# EAGLE board trackoon solar (EAGLE 7.2.0)
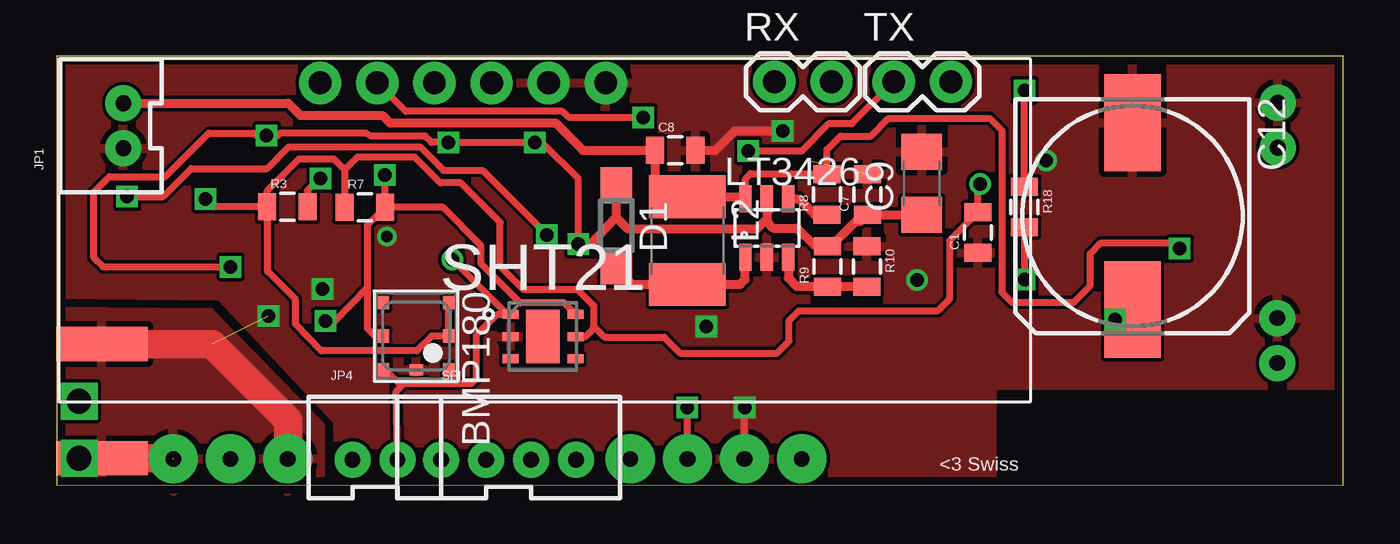
[diagram p0: board, top side]
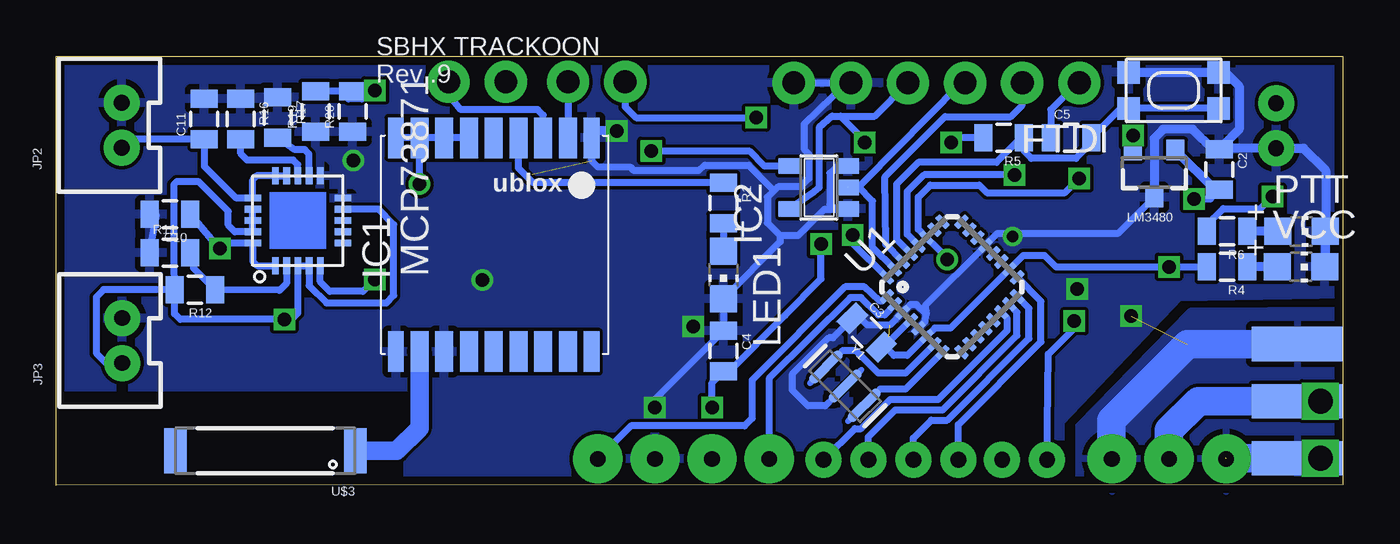
[diagram p1: board, bottom side, seen from below]

Size 57.2 x 19.07 mm. Coordinates in mm from the lower left corner, seen from the top.
Outline: 0,0.03 57.2,0 57.2,19.07 0,19.07 0,0.03
Copper layers (1*16): Top 0.0356mm / dielectric 1.5011mm / Bottom 0.0356mm
Design rules "oshpark-2layer": minimum track width 6mil, minimum drill 13mil, track to track 6mil, track to pad 6mil, pad to pad 6mil, via to via 6mil, smd to smd 6mil, copper to edge 15mil, drill to drill 6mil, minimum pad ring 7mil, minimum via ring 7mil, stop-mask expansion 4mil, vias tented up to drill 0mil, thermal gap 10mil

## Footprints (pad centres in the part's own frame; a part is rotated, then mirrored left to right if it is on the bottom)
BMP180 = smd 0.6 x 0.5: 1 1.5,1.45; 2 0,1.45; 3 -1.5,1.45; 4 -1.5,-1.45; 5 0,-1.45; 6 1.5,-1.45 | smd 0.5 x 0.6: 7 1.5,0
0805 = smd 0.8 x 1.2: 1 -0.9,0; 2 0.9,0
C1206 = smd 1.6 x 1.8: 1 -1.4,0; 2 1.4,0
153CLV-1012 = smd 4.3 x 2.5: + 4.15,0; - -4.15,0
SOD123 = smd 1.4 x 1.4: A 1.9,0; C -1.9,0
1X06_NO_SILK = drill 1.016 pad 1.88: 1 0,0; 2 2.54,0; 3 5.08,0; 4 7.62,0; 5 10.16,0; 6 12.7,0
QFN20 = smd 0.75 x 0.3: 1 -2,1; 2 -2,0.5; 3 -2,0; 4 -2,-0.5; 5 -2,-1; 11 2,-1; 12 2,-0.5; 13 2,0; 14 2,0.5; 15 2,1 | smd 0.3 x 0.75: 6 -1,-2; 7 -0.5,-2; 8 0,-2; 9 0.5,-2; 10 1,-2; 16 1,2; 17 0.5,2; 18 0,2; 19 -0.5,2; 20 -1,2
SOT23-5 = smd 0.69 x 0.99: 1 -0.95,-1.29; 2 0,-1.29; 3 0.95,-1.29; 4 0.95,1.3; 5 -0.95,1.3
SMA-EDGE = smd 1.524 x 4.064: GND@0 0,0; GND@1 5.08,0; SIG 2.54,0 | smd 1.524 x 4.064 bottom: GND@2 0,0; GND@3 5.08,0
JST-2-PTH-VERT = drill 0.7 pad 1.6: 1 -1,-0.55; 2 1,-0.55
L1812 = smd 1.9 x 3.4: 1 -1.95,0; 2 1.95,0
CHIP-LED0805 = smd 1.2 x 1.2: A 0,-1.05; C 0,1.05
SOT23-3 = smd 0.8 x 0.9: 1 -0.95,-1; 2 0.95,-1; 3 0,1.1
SOT23-6 = smd 0.55 x 1.2: 1 -0.95,-1.3; 2 0,-1.3; 3 0.95,-1.3; 4 0.95,1.3; 5 0,1.3; 6 -0.95,1.3
1X02 = drill 1.016 pad 1.88: 1 0,0; 2 2.54,0
DFN300X300X110-7N = smd 0.711 x 0.406: 1 -1.448,0.991; 2 -1.448,0; 3 -1.448,-0.991; 4 1.448,-0.991; 5 1.448,0; 6 1.448,0.991 | smd 1.499 x 2.388: 7 0,0
JST-4-PTH-VERT = drill 0.7 pad 1.6: 1 -3,-0.55; 2 -1,-0.55; 3 1,-0.55; 4 3,-0.55
KMR2 = smd 1 x 1: 1 2,0.8; 2 2,-0.8; 3 -2,0.8; 4 -2,-0.8
MLF32 = smd 0.7 x 0.3: 1 -2.35,1.75; 2 -2.35,1.25; 3 -2.35,0.75; 4 -2.35,0.25; 5 -2.35,-0.25; 6 -2.35,-0.75; 7 -2.35,-1.25; 8 -2.35,-1.75; 17 2.35,-1.75; 18 2.35,-1.25; 19 2.35,-0.75; 20 2.35,-0.25; 21 2.35,0.25; 22 2.35,0.75; 23 2.35,1.25; 24 2.35,1.75 | smd 0.3 x 0.7: 9 -1.75,-2.35; 10 -1.25,-2.35; 11 -0.75,-2.35; 12 -0.25,-2.35; 13 0.25,-2.35; 14 0.75,-2.35; 15 1.25,-2.35; 16 1.75,-2.35; 25 1.75,2.35; 26 1.25,2.35; 27 0.75,2.35; 28 0.25,2.35; 29 -0.25,2.35; 30 -0.75,2.35; 31 -1.25,2.35; 32 -1.75,2.35
UBLOX_MAX = smd 1.8 x 0.7: 1_GND 4.95,-4.4; 9_V_RESET 4.95,4.3; 10_GND -4.55,4.3; 18_RESERVED -4.55,-4.4 | smd 1.8 x 0.8: 2_TXD1 4.95,-3.35; 3_RXD1 4.95,-2.25; 4_TIMEPULSE 4.95,-1.15; 5_EXTINT0 4.95,-0.05; 6_V_BCKP 4.95,1.05; 7_VCC_IO 4.95,2.15; 8_VCC 4.95,3.25; 11_RF_IN -4.55,3.25; 12_GND -4.55,2.15; 13_ANTON -4.55,1.05; 14_VCC_RF -4.55,-0.05; 15_RESERVED -4.55,-1.15; 16_SDA2 -4.55,-2.25; 17_SCL2 -4.55,-3.35
RADIOMETRIX-HX1 = drill 0.7 pad 2.184: 0V 8.89,-10.16; EN 3.81,-10.16; RFGND -11.43,-10.16; RFGND2 -16.51,-10.16; RFOUT -13.97,-10.16; TXD 11.43,-10.16; VCC 6.35,-10.16
ANTENNA-CHIP4 = smd 1 x 2: NC 4,0; SIG -4,0
RESONATOR-SMD = smd 0.45 x 1.905: 1 -1.2,0; 2 0,0; 3 1.2,0

## Placement (x,y rotation side)
BMP180  BMP180  [BMP180]  15.98,6.63 270 top
C1  .1uf  [0805]  40.94,11.23 90 top
C2  .1uf  [0805]  5.49,14.02 270 bottom
C3  .1uf  [0805]  21.16,6.78 315 bottom
C4  .1uf  [0805]  27.53,5.97 270 bottom
C5  .1uf  [0805]  12.07,15.45 0 bottom
C7  22uf  [0805]  36.04,12.93 90 top
C8  10uf  [0805]  27.51,14.88 0 top
C9  100uf  [C1206]  38.46,13.41 90 top
C10  10uf  [0805]  52.15,12.04 180 bottom
C11  10uf  [0805]  50.62,16.28 90 bottom
C12  [153CLV-1012]  47.83,11.96 270 top
D1  MBR120VLSFT1  [SOD123]  24.87,11.53 270 top
FRAME1  FRAME-LETTER  [CREATIVE_COMMONS]  14.38,-8.13 0 top  (outside the outline)
FTDI  [1X06_NO_SILK]  11.71,17.88 180 bottom
IC1  MCP73871  [QFN20]  46.46,11.76 90 bottom
IC2  74AHC1G125DBV  [SOT23-5]  23.29,13.23 90 bottom
J$1  SMA_EDGE  [SMA-EDGE]  2.01,1.19 90 bottom
JP1  M02JST-PTH-VERT  [JST-2-PTH-VERT]  2.41,15.98 90 top
JP2  M02JST-PTH-VERT  [JST-2-PTH-VERT]  54.84,16 90 bottom
JP3  M02JST-PTH-VERT  [JST-2-PTH-VERT]  54.81,6.43 90 bottom
JP4  M02JST-PTH-VERT  [JST-2-PTH-VERT]  14.15,1.68 0 top
L2  2.2uh  [L1812]  28.04,10.87 270 top
LED1  [CHIP-LED0805]  27.53,9.35 180 bottom
LM3480  LM3480IM4  [SOT23-3]  8.38,13.89 180 bottom
LT3426  LT3426  [SOT23-6]  31.57,11.43 0 top
PTT  [CHIP-LED0805]  1.83,11.28 270 bottom
R1  100ohm  [0805]  27.53,12.55 270 bottom
R3  4.7k  [0805]  10.26,12.37 0 top
R4  330ohm  [0805]  5.13,9.7 180 bottom
R5  10k  [0805]  15.08,15.43 180 bottom
R6  330ohm  [0805]  5.13,11.28 180 bottom
R7  4.7k  [0805]  13.69,12.34 0 top
R8  1m  [0805]  34.24,12.93 90 top
R9  95.3k  [0805]  34.26,9.73 90 top
R10  30.9k  [0805]  36.02,9.73 270 top
R11  100k  [0805]  52.15,10.34 0 bottom
R12  270k  [0805]  51.03,8.69 180 bottom
R16  2k  [0805]  49,16.28 270 bottom
R17  100k  [0805]  47.35,16.33 270 bottom
R18  1k  [0805]  43.03,12.37 270 top
R19  10k  [0805]  45.67,16.61 90 bottom
R20  150k  [0805]  44.02,16.61 90 bottom
RX  RX  [1X02]  31.9,17.93 0 top
SHT21  SHT21  [DFN300X300X110-7N]  21.62,6.6 0 top
SPI  [JST-4-PTH-VERT]  20.09,1.68 0 top
SW1  SPST_TACT-KMR2  [KMR2]  7.52,17.55 180 bottom
TX  TX  [1X02]  37.21,17.93 0 top
U1  ATMEGA168MLF  [MLF32]  17.37,8.81 45 bottom
U$1  UBLOX_MAX  [UBLOX_MAX]  37.8,10.49 90 bottom
U$2  RADIOMETRIX-HX1  [RADIOMETRIX-HX1]  21.69,11.33 0 top
U$3  ANTENNA2SMD3  [ANTENNA-CHIP4]  47.9,1.52 180 bottom
VCC  [CHIP-LED0805]  1.85,9.7 270 bottom
Y1  16MHZ  [RESONATOR-SMD]  22.13,4.4 315 bottom

## Library data of the parts
BMP180 = SparkFun-Sensors
C1-C5 C7 C8 C10 C11 = SparkFun-Capacitors
C9 L2 = resistor
C12 IC1 LED1 LT3426 PTT SW1 VCC = adafruit
D1 = diode
FRAME1 = SparkFun-Aesthetics
FTDI = SparkFun-Connectors; PROD_ID: CONN-08437
IC2 = 74xx-little-us
J$1 JP1-JP4 RX SPI TX = SparkFun-Connectors
LM3480 = SparkFun-PowerIC
R1 R3-R12 R16-R20 = SparkFun-Resistors
SHT21 = sht21; MPN: SHT21; OC_FARNELL: 1855468; OC_NEWARK: 20T1172; PACKAGE: DFN-6; SUPPLIER: SENSIRION
U1 = SparkFun-DigitalIC
U$1 U$2 = Ava
U$3 = SparkFun-RF
Y1 = SparkFun-FreqCtrl; PROD_ID: XTAL-08900

## Nets
3V: BMP180.2 BMP180.3 C1.2 C2.2 LM3480.1 R3.1 R7.1 SHT21.5 U$1.6_V_BCKP U$1.7_VCC_IO U$1.8_VCC U$1.9_V_RESET
15V: C8.1 C10.1 IC1.1 IC1.20 JP1.2 L2.1 LT3426.6 R8.2
D3: U1.1 U$2.TXD
D4: U1.2 U$2.EN
DTR: C5.1 FTDI.1
GND: BMP180.7 C1.1 C2.1 C3.1 C4.1 C7.2 C8.2 C9.2 C10.2 C11.2 C12.- FTDI.5 FTDI.6 IC1.10 IC1.11 IC2.1 IC2.3 J$1.GND@0 J$1.GND@1 J$1.GND@2 J$1.GND@3 JP1.1 JP2.2 JP3.2 LED1.C LM3480.3 LT3426.2 PTT.C R10.1 R11.1 R16.1 R17.1 R19.1 R20.1 SHT21.2 SW1.2 SW1.4 U1.3 U1.5 U1.21 U$1.1_GND U$1.10_GND U$1.12_GND U$2.0V U$2.RFGND U$2.RFGND2 VCC.C Y1.2
LED: R6.2 U1.32
MISO: SPI.2 U1.16
MOSI: SPI.3 U1.15
N$1: J$1.SIG U$2.RFOUT
N$2: R1.1 U$1.4_TIMEPULSE
N$3: LED1.A R1.2
N$6: U$1.11_RF_IN U$3.SIG
N$8: R4.1 VCC.A
N$9: D1.A L2.2 LT3426.1
N$12: LT3426.4 R8.1
N$13: LT3426.3 R9.1 R10.2
N$14: U1.8 Y1.3
N$17: IC1.2 R11.2 R12.1
N$19: C5.2 R5.1 SW1.1 SW1.3 U1.29
N$23: IC1.13 R16.2
N$25: IC1.12 R17.2
N$26: U1.7 Y1.1
N$27: PTT.A R6.1
N$29: IC1.5 R18.2
N$30: R18.1 R19.2 R20.2
RX: TX.2 U$1.3_RXD1
RXO: FTDI.2 RX.1 U1.30
SCK: SPI.1 U1.17
SCL: BMP180.5 JP4.1 R7.2 SHT21.6 U1.28
SDA: BMP180.6 JP4.2 R3.2 SHT21.1 U1.27
SS: SPI.4 U1.14
TX: RX.2 U$1.2_TXD1
TX1: IC2.4 TX.1
TXO: FTDI.3 IC2.2 U1.31
VBATT: C11.1 IC1.14 IC1.15 IC1.16 JP2.1
VCC: C3.2 C4.2 C7.1 C9.1 D1.C FTDI.4 IC2.5 LM3480.2 LT3426.5 R4.2 R5.2 R9.2 U1.4 U1.6 U1.18 U$2.VCC
VSOLAR: C12.+ IC1.3 IC1.4 IC1.9 IC1.17 IC1.18 IC1.19 JP3.1 R12.2

## Tracks (layer width: path | path; a pad name or v marks a point on that pad's centre or on a via)
3V  (via drill 0.6)
  Top 0.305: R3.1 6.96,12.37 v6.6,12.73 | R3.1 9.36,13.1 10.77,14.5 12.32,14.5 12.8,14.02 | 12.8,14.02 12.8,12.36 R7.1 12.79,12.23 | 12.8,14.02 13.36,14.58 15.9,14.58 17.04,13.44 17.96,13.44 19.71,11.68 19.71,9.73 20.75,8.69 23.16,8.69 23.88,7.98 23.88,7.06 | R3.1 9.37,12.36 9.37,9.5 10.62,8.26 10.62,7.16 11.76,5.97 16,5.97 16.66,6.63 BMP180.2 BMP180.3 | SHT21.5 23.52,6.6 23.88,6.96 23.88,7.06 | 23.88,7.06 24.36,6.58 27,6.58 27.71,5.87 32.03,5.87 32.56,6.4 32.56,7.32 32.99,7.75 39.17,7.75 39.7,8.28 39.7,10.88 C1.2 40.95,13.23 v41.05,13.39
  Bottom 0.305: U$1.6_V_BCKP U$1.7_VCC_IO U$1.8_VCC | U$1.8_VCC U$1.9_V_RESET | v6.6,12.73 5.88,12.73 C2.2 | v41.05,13.39 U$1.8_VCC
  Bottom 0.406: C2.2 5.66,13.12 LM3480.1
15V  (via drill 0.6)
  Top 0.305: LT3426.6 30.62,13.63 30.84,13.84 34.23,13.84 R8.2 34.24,14.91 34.85,15.52 36.2,15.52 36.98,16.31 41.48,16.31 42.01,15.77 42.01,8.59 42.47,8.13 45.21,8.13 45.95,8.86 45.95,10.29 46.43,10.77 49.82,10.77 v49.93,10.52
  Top 0.406: JP1.2 10.28,16.98 10.82,16.43 14.48,16.43 14.81,16.1 22.17,16.1 23.39,14.88 C8.1 26.61,13.55 27.36,12.8 28.02,12.8 L2.1 30.53,12.82 LT3426.6
  Bottom 0.305: IC1.1 48.26,9.75 48.46,9.95 IC1.20 49.81,10.76 v49.93,10.52 50.19,10.78 C10.1
D3
  Bottom 0.305: U1.1 20.48,8.18 20.57,8.18 21.26,8.81 22.12,8.81 26.26,4.67 26.26,2.97 26.59,2.64 31.65,2.64 U$2.TXD
D4
  Bottom 0.305: U1.2 20.36,7.57 20.65,7.57 21.41,8.33 21.89,8.33 25.5,4.75 U$2.EN
DTR
  Bottom 0.305: FTDI.1 11.79,17.88 12.98,16.69 C5.1
GND  (via drill 0.5, 0.6, 1.1)  (4 unrouted)
  Top 0.305: U$2.0V v30.58,3.45
  Top 0.406: C8.2 29.29,14.88 30.15,15.75 v32.28,15.75
  Top 1.27: J$1.GND@1 6.91,6.27 10.29,2.9 10.29,1.19 U$2.RFGND | 1.91,1.19 5.21,1.19
  Bottom 0.305: U1.5 18.57,7.27 18.52,7.59 | 18.52,7.59 18.95,8.03 19.22,8.03 U1.3 20.14,7.11 21.13,7.11 21.44,7.42 C3.1 22.66,6.55 22.86,6.55 24.49,4.93 24.49,4.24 23.77,3.53 23,3.53 22.84,3.69 | 18.52,7.59 18.57,7.97 U1.21 15.37,11.18 10,11.18 LM3480.3 | FTDI.6 22.05,17.88 | FTDI.5 22.05,17.88 | 22.05,17.88 23.95,16.05 23.95,14.94 23.72,14.71 23.72,13.64 24.11,13.26 25.12,13.26 25.3,13.08 | 25.3,13.08 25.58,12.8 25.58,11.66 25.02,11.1 | 25.02,11.1 24.21,11.1 23.04,12.27 22.55,12.27 | 22.55,12.27 22.02,12.27 IC2.1 | IC2.3 22.44,14.18 22.81,13.87 22.81,12.47 22.55,12.27 | 25.02,11.1 25.02,10.81 LED1.C C4.1 30.58,3.82 v30.58,3.45 | U$1.1_GND 33.4,14.42 33.12,14.15 31.67,14.15 31.52,14 28.63,14 28.37,14.22 26.42,14.22 25.3,13.08 | R11.1 52.74,12.01 C10.2
  Bottom 0.406: SW1.2 SW1.4 5.22,18.35 4.6,17.73 4.6,15.81 C2.1 | VCC.C 0.78,9.73 PTT.C 0.76,11.29 0.76,14 1.74,14.98 JP1.1 5.43,14.98 C2.1 | C2.1 5.78,14.92 6.68,15.82 7.98,15.82 8.38,15.42 LM3480.3 | v32.28,15.75 33.19,15.75 U$1.1_GND
  Bottom 1.27: U$2.RFGND2 5.16,1.19 J$1.GND@2 | J$1.GND@1 6.91,6.27 10.29,2.9 10.29,1.19 U$2.RFGND
  other vias: 28.88,7.06 9.4,7.52 14.68,11.05 11.81,8.71 0.99,1.19 43.99,14.43 38.25,9.12
  pour Top: -0.13,19.08 57.4,19.23 57.43,4.42 41.58,4.42 41.58,-0.3 12.6,-0.46 12.5,2.84 7.29,8.38 -0.1,8.46
  pour Bottom: -0.15,19.08 57.38,19.2 57.43,4.37 41.58,4.37 41.58,-0.33 12.7,-0.46 12.55,-0.3 12.55,2.82 7.29,8.38 -0.2,8.51
  pour Top: -0.1,7.75 6.81,7.7 11.71,2.67 11.71,-0.46 -0.1,-0.33
  pour Bottom: -0.1,7.77 6.78,7.72 11.76,2.62 11.76,-0.43 0,-0.41
LED  (via drill 0.6)
  Top 0.305: v3.12,12.83 4.72,12.83 5.97,14.07 9.35,14.07 10.31,15.04 16.15,15.04 17.2,14 18.92,14 v21.79,11.13
  Bottom 0.305: R6.2 6.03,11.57 5.31,12.29 3.66,12.29 v3.12,12.83 | v21.79,11.13 21.79,10.76 U1.32
MISO
  Bottom 0.305: SPI.2 19.09,2.09 18.29,2.9 17.58,2.9 13.95,6.53 13.95,7.86 U1.16
MOSI
  Bottom 0.305: SPI.3 21.09,2.15 19.89,3.35 17.78,3.35 14.48,6.65 14.48,7.69 U1.15
N$1
  Bottom 1.27: J$1.SIG 6.43,3.73 7.72,2.44 U$2.RFOUT
N$2
  Bottom 0.305: R1.1 36,13.45 36.65,14.1 36.65,15.53 U$1.4_TIMEPULSE
N$3
  Bottom 0.305: R1.2 LED1.A
N$6
  Bottom 0.813: U$1.11_RF_IN 41.05,2.54 42.06,1.52 U$3.SIG
N$8
  Bottom 0.406: VCC.A R4.1
N$9
  Top 0.406: LT3426.1 30.61,10.11 30.61,9.14 30.38,8.92 L2.2 25.58,8.92 D1.A
N$12
  Top 0.406: LT3426.4 32.99,12.73 33.71,12.01 34.23,12.01 R8.1
N$13
  Top 0.406: R10.2 R9.1 34.25,8.84 32.89,8.84 32.52,9.21 LT3426.3
N$14
  Bottom 0.305: U1.8 19.44,4.27 20.56,4.27
N$17
  Bottom 0.305: IC1.2 46.96,8.97 47.27,8.66 R12.1 51.09,9.65 R11.2
N$18  (via drill 1.1)
  other vias: 0.99,3.73
N$19
  Bottom 0.305: SW1.3 SW1.1 9.87,16.75 C5.2 11.17,15.22 11.86,14.53 13.84,14.53 14.17,14.86 R5.1 14.31,15.43 15.39,14.35 18.87,14.35 19.84,13.39 19.84,10.92 U1.29
N$23
  Bottom 0.305: IC1.13 46.46,14.25 46.66,14.45 48.72,14.45 49,14.73 R16.2
N$25
  Bottom 0.305: IC1.12 45.96,14.71 46.15,14.91 46.59,14.91 R17.2
N$26
  Bottom 0.305: U1.7 19.44,4.98 20.65,4.98 21.64,5.97 22.26,5.97
N$27
  Bottom 0.406: PTT.A R6.1
N$29  (via drill 0.6)
  Top 0.305: R18.2 v43.03,9.14
  Bottom 0.305: v43.03,9.14 43.56,8.61 45.03,8.61 45.47,9.04 IC1.5
N$30  (via drill 0.6)
  Top 0.305: R18.1 v43.03,17.55
  Bottom 0.305: v43.03,17.55 43.61,17.17 44.21,17.17 R20.2 R19.2
RX
  Bottom 0.305: U$1.3_RXD1 35.55,16.44 35.79,16.69 39.22,16.69 39.75,17.35 TX.2
RXO  (via drill 0.6)
  Top 0.305: v26.09,16.33 22.78,16.33 22.48,16.61 15.52,16.61 FTDI.2
  Bottom 0.305: U1.30 20.32,10.7 20.34,13.72 17.68,16.38 14.76,16.38 14.25,16.89 FTDI.2 | RX.1 31.9,16.81 31.42,16.33 v26.09,16.33
SCK
  Bottom 0.305: SPI.1 17.09,2.7 13.41,6.38 13.41,8.17 U1.17
SCL  (via drill 0.6)
  Top 0.305: R7.2 14.59,13.3 v14.58,13.79 | BMP180.5 14.17,6.6 13.82,6.96 13.82,8.79 | 13.82,8.79 13.82,11.57 R7.2 | SHT21.6 22.55,8.1 20.6,8.1 18.86,9.84 U1.28 17.17,12.34 R7.2 | v11.94,7.29 12.34,7.29 13.82,8.79
  Bottom 0.305: U1.28 19.36,11.15 19.36,13.06 18.62,13.79 v14.58,13.79 | JP4.1 13.1,5.83 11.94,6.99 v11.94,7.29
SDA  (via drill 0.6)
  Top 0.305: v11.71,13.64 11.68,13.64 11.15,13.11 11.15,12.38 R3.2 | BMP180.6 14.76,4.98 15.21,4.52 15.44,4.52 | 15.44,4.52 18.44,4.52 18.67,4.75 18.67,6.68 19.58,7.59 SHT21.1 20.02,7.59 v17.58,10.03 | JP4.2 15.1,4.18 15.44,4.52
  Bottom 0.305: v11.71,13.64 12.34,13 15.82,13 16.15,13.34 18.34,13.34 18.87,12.8 18.87,11.37 U1.27 17.58,10.1 v17.58,10.03
SS
  Bottom 0.305: SPI.4 23.04,1.17 21.69,2.51 21.41,2.51 20.12,3.81 17.98,3.81 14.91,6.88 14.91,7.41 U1.14
TX
  Bottom 0.305: RX.2 34.44,15.54 U$1.2_TXD1
TX1  (via drill 0.6)
  Top 0.305: v30.73,14.86 33.12,14.86 34.34,16.08 35.36,16.08 TX.1
  Bottom 0.305: IC2.4 25.71,14.18 26.36,14.83 30.72,14.84 v30.73,14.86
TXO
  Bottom 0.305: FTDI.3 17.02,17.83 21.29,13.49 21.44,13.34 21.59,13.34 | 21.59,13.34 21.88,13.36 IC2.2 | U1.31 20.9,10.58 20.9,12.62 21.51,13.23 21.59,13.34
VBATT
  Bottom 0.305: IC1.14 IC1.15 48.26,13.77 48.46,13.57 IC1.16 48.47,12.78 49.23,12.78 50.62,14.17 C11.1 53.89,15.38 54.18,15.37 54.36,15.04 JP2.1
VCC  (via drill 0.6)
  Top 0.305: v7.72,9.7 2.06,9.7 1.65,10.11 1.65,13.03 2.34,13.72 4.83,13.72 6.76,15.65 8.76,15.65 8.87,15.54 v9.32,15.54 9.83,15.54 9.93,15.65 13.74,15.65 13.97,15.52 16.38,15.52 16.66,15.24 v17.4,15.24 v21.26,15.24 21.57,15.24 23.19,13.61 v23.19,10.72 | U$2.VCC v28.04,3.45
  Top 0.406: 34.23,10.67 33.68,10.67 32.92,11.43 31.85,11.43 31.57,11.71 LT3426.5 31.57,11.84 31.14,11.4 25.38,11.4 24.87,11.91 | 34.23,10.67 R9.2 | 34.23,10.67 34.47,10.67 35.53,11.73 35.75,11.73 C7.1 36.21,12.03 C9.1 | D1.C 24.87,11.91 | v23.19,10.72 23.72,10.72 24.87,11.91
  Bottom 0.305: U1.4 20.34,6.2 C3.2 20.37,6.17 19.96,5.77 19.36,5.77 U1.6 18.14,6.99 17.43,6.99 U1.18 14.21,10.21 13.26,10.21 12.75,9.7 v7.72,9.7 R4.2 | IC2.5 23.5,13.05 23.27,13.23 23.27,15.9 22.71,16.41 22.33,16.41 | 22.33,16.41 20.8,16.41 FTDI.4 | v9.32,15.54 LM3480.2 | R5.2 17.05,15.43 v17.4,15.24 | v21.26,15.24 21.26,15.34 22.33,16.41 | v28.04,3.45 28.04,4.56 C4.2 27.27,5.07 24.79,7.54 23.19,9.17 v23.19,10.72
VSOLAR  (via drill 0.6)
  Top 0.305: v47.07,7.37 47.51,7.37 C12.+
  Bottom 0.305: IC1.17 IC1.18 IC1.19 49.26,11.26 49.55,11.56 49.55,12.17 50.88,13.49 51.84,13.49 51.97,13.36 51.97,9.56 R12.2 | R12.2 55.09,8.69 55.42,8.36 55.42,5.87 54.99,5.44 54.27,5.44 JP3.1 | R12.2 51.94,8.67 51.94,7.62 51.69,7.37 v47.07,7.37 46.74,7.37 46.46,7.65 IC1.3 IC1.4 45.96,8.87 45.19,8.1 42.52,8.1 42.19,8.43 42.19,11.58 42.88,12.27 44.45,12.27 IC1.9

## Text on the board
tNames: <3 Swiss
bNames: SBHX TRACKOON / Rev .9